# Altium PCB Tray3.PcbDoc
Units mil, origin at the board's own origin, x right, y up, seen from the top; angles counter-clockwise.
Board outline 4725 x 1180 mil, 2 copper layers (Top Layer, Bottom Layer); 13 components, 10 nets, 65 pads, 2 vias.
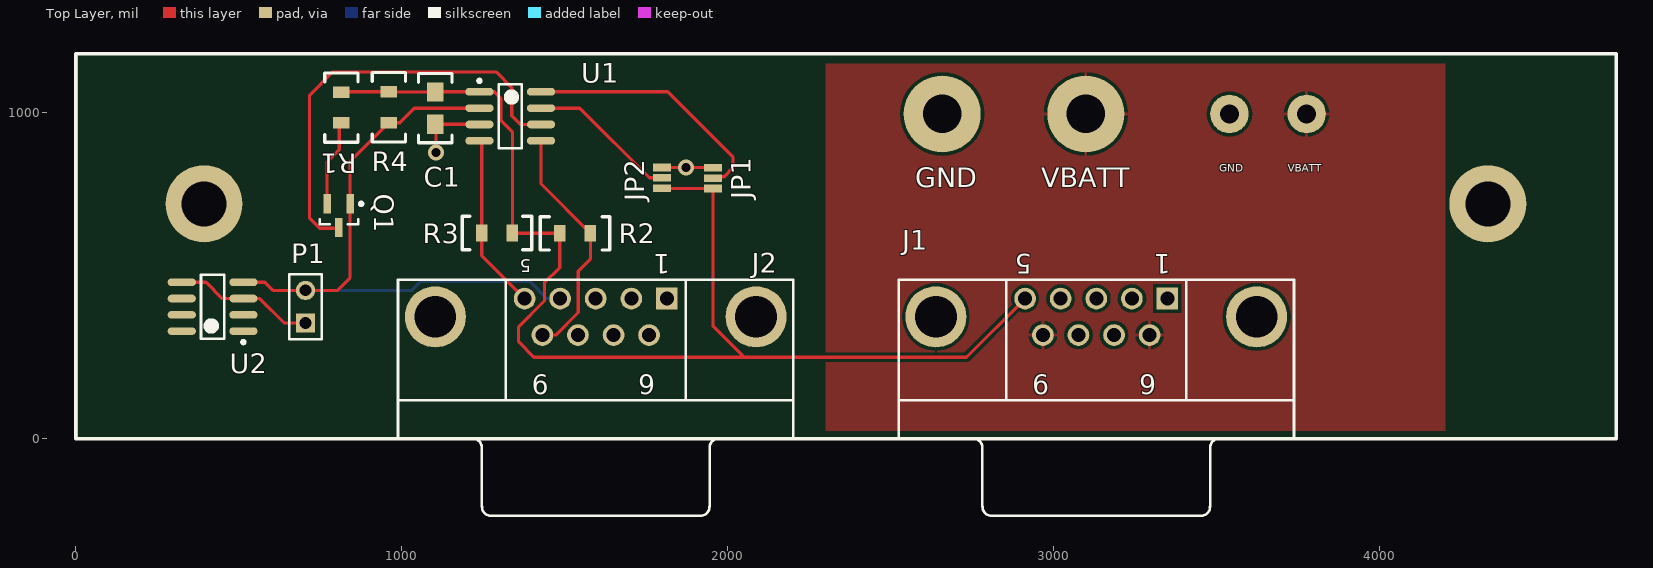
[diagram p0: Top Layer view]
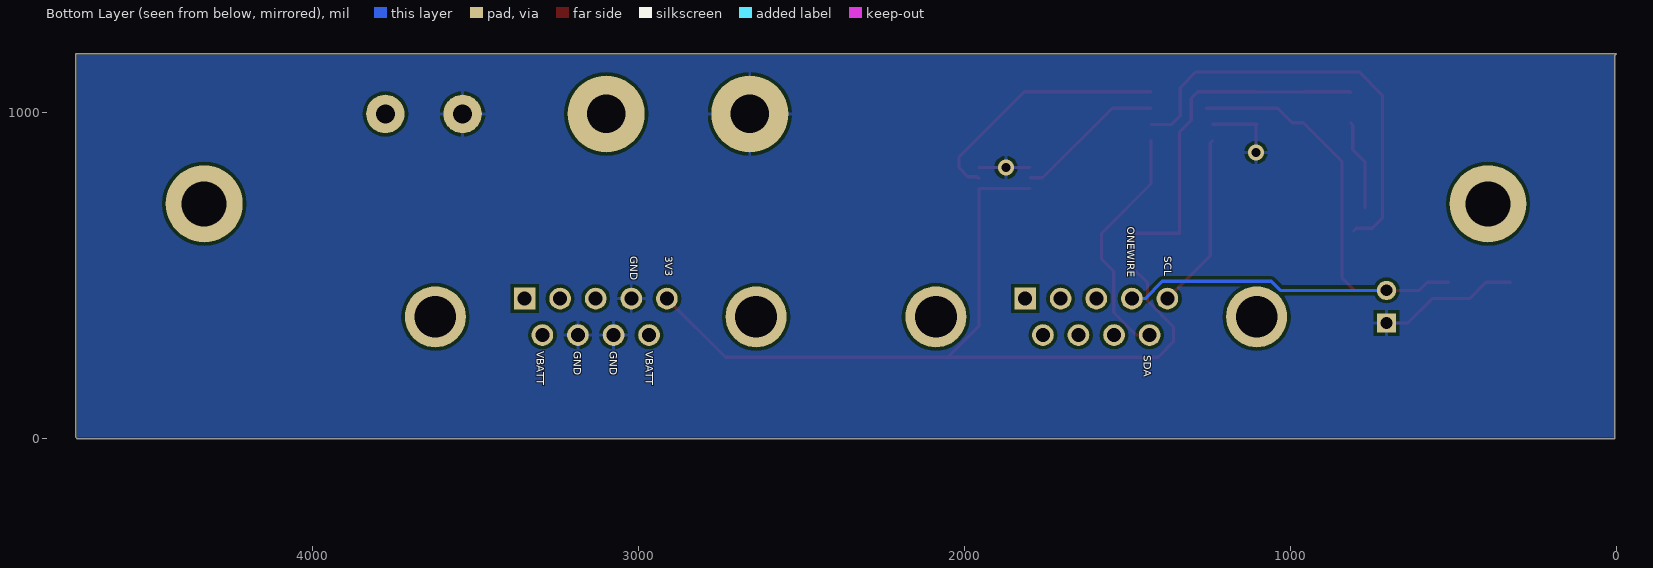
[diagram p1: Bottom Layer view, seen from below]

## Layer stack, top to bottom
Top Layer: signal copper 1.4
Dielectric: dielectric 12.6, FR-4, Dk 4.8
Bottom Layer: signal copper 1.4

## Board outline
0,1180 5,1175 5,0 4720,0 4725,5 4725,1180

## Design rules (kind name [scope] priority, off if disabled: settings)
Clearance [All] p1: gap=6
HoleSize [All] p1: absolutevalues=TRUE maxlimit=140 minlimit=1 maxpercent=80.000 minpercent=20.000
MinimumSolderMaskSliver [All] p1: minsoldermaskwidth=6
PolygonConnect [All] p1: connectstyle=Relief reliefconductorwidth=10 reliefentries=4 polygonreliefangle="90 Angle"
RoutingVias [All] p1: holewidth=28 width=50 viastyle="Through Hole" minholewidth=28 minwidth=50 maxholewidth=28 maxwidth=50
SilkscreenOverComponentPads [All] p1: minsilkscreentomaskgap=10
SolderMaskExpansion [All] p1: expansion=4
Width [All] p1: maxlimit=10 minlimit=10 preferedwidth=10
25 further rules are at their usual default settings.

## Classes and differential pairs
component class Tray3: J1 J2
component class Designator: U2

## Components (designator, comment, footprint, x,y, rotation, side; value= is the part's Value field where it differs from the comment)
C1 "0805 Cap" "0805 Cap" 1102.83,1013.98 r270 top
J1 "D Connector 9" DSUB1.385-2H9 3130,0 r180 top locked
J2 "D Connector 9" DSUB1.385-2H9 1595,0 r180 top locked
JP1 "Jumper Select" SOLDER_JUMPER_3_A 1962.6,807.09 r270 top
JP2 "Jumper Select" SOLDER_JUMPER_3_A 1806.1,808.07 r270 top
P1 "Header 2" HDR1X2 705,355 r90 top
Q1 "DMP2004K" DMP2004KDITR-ND 807.09,685.04 r270 top
R1 "0805 Resistor" "0805 Resistor" 814.96,1015.75 r270 top
R2 "0805 Resistor" "0805 Resistor" 1531.5,629.92 r0 top
R3 "0805 Resistor" "0805 Resistor" 1292.32,630.91 r180 top
R4 "0603 Resistor" "0805 Resistor" 960.63,1016.73 r270 top
U1 "DS24820Z+_ND" DS2482-100 1332.83,988.98 r0 top
U2 "TO-92" DS18S20 420,405 r180 top

## Footprints (in the part's own frame and the unit in brackets; to place one, negate y for a bottom-side part, rotate by r counter-clockwise, add the part's x,y. Pads: shape width x height; smd on the part's side, far side on the other; paste and mask are expansions set on the pad)
"0805 Cap" [mm] "0805 Capacitor"
  rect 1.5x1.25 smd: 1(1.25,0) 2(-1.25,0)
  silkscreen extent -2.7,-1.3 2.7,1.3, body extent -1,-0.63 1.1,0.63, height 0.9
"0805 Resistor" [mm] "0805 Resistor"
  rect 0.9x1.3 smd: 1(1.2,0) 2(-1.2,0)
  silkscreen extent -2.7,-1.3 2.7,1.3, body extent -1,-0.63 1.1,0.63, height 0.6
DMP2004KDITR-ND [mm] "SOT23, 3-Leads, Body 3.0x2.5mm (max), Pitch 0.89mm, IPC Medium Density"
  rect 1.5x0.6 smd: 1(-0.9,0.89) 2(-0.9,-0.89) 3(0.951,0)
  silkscreen extent -1.02,-1.5 0.7,1.87, body extent -0.7,-1.5 0.7,1.5, height 1.2
DS18S20 [mm] "SOIC, 8-Leads, Body 5.0x4.0mm (max), Pitch 1.27mm, IPC Medium Density"
  oval 2.2x0.6 smd: 1(-2.4,1.905) 2(-2.4,0.635) 3(-2.4,-0.635) 4(-2.4,-1.905) 5(2.4,-1.905) 6(2.4,-0.635) 7(2.4,0.635) 8(2.4,1.905)
  silkscreen extent -2.53,-2.5 0.9,2.88, body extent -2,-2.5 2,2.5, height 1.75
DS2482-100 [mm] "SOIC, 8-Leads, Body 5.0x4.0mm (max), Pitch 1.27mm, IPC Medium Density"
  oval 2.2x0.6 smd: 1(-2.4,1.905) 2(-2.4,0.635) 3(-2.4,-0.635) 4(-2.4,-1.905) 5(2.4,-1.905) 6(2.4,-0.635) 7(2.4,0.635) 8(2.4,1.905)
  silkscreen extent -2.52,-2.5 0.9,2.88, body extent -2,-2.5 2,2.5, height 1.75
DSUB1.385-2H9 [mm] "Connector; D Subminiature; 9 Position; Right Angle; Pitch 1.385 mm"
  rect 1.69x1.69 hole 1.09: 1(-5.54,-10.92)
  round 1.69 hole 1.09: 2(-2.77,-10.92) 3(0,-10.92) 4(2.77,-10.92) 5(5.54,-10.92) 6(-4.155,-8.08) 7(-1.385,-8.08) 8(1.385,-8.08) 9(4.155,-8.08)
  round 4.76 hole 3.26: 10(-12.495,-9.5) 11(12.495,-9.5)
  silkscreen extent -15.4,-12.4 15.4,6
HDR1X2 [mm] "Connector; Header; 2 Position"
  rect 1.5x1.5 hole 0.9: 1(0,0)
  round 1.5 hole 0.9: 2(2.54,0)
  silkscreen extent -1.27,-1.27 3.81,1.27
SOLDER_JUMPER_3_A [mm]
  rect 0.6x1.4 smd: 1(1,-0.2) 2(0.2,-0.2) 3(-0.6,-0.2)

## Part data
C1: library part "0805 MLCC - X7R, 10%", "0805 MLCC - X7R, 10%"
J1 J2: "Receptacle Assembly, 9 Position, Right Angle"
JP1 JP2: library part "Header 3", "Header, 3-Pin"
P1: "Header, 2-Pin"
Q1: "MOSFET P-CH 20V 600MA SOT23-3"
R1 R2 R3: library part "0805 Thick Film Resistor 1%", "0805 Thick Film Resistor 1%"
R4: library part "0603 Thick Film Resistor 1%", "0603 Thick Film Resistor 1%"
U2: library part DS18S20

## Free pads (board coordinates)
  round 236.22 hole 118.11: 0(2657.48,996.06) 0(3098,996.06)
  round 118.11 hole 59.06: 0(3538.48,996.06) 0(3775,996.06)
  round 236.22 hole 137.79 mask+4: MP0(393.7,720.47)
  round 236.22 hole 137.79: MP1(4330.7,720.47)

## Via types
v1: diameter 50, hole 28, Top Layer to Bottom Layer, 2 vias

## Nets (pads, with @x,y where several pads share a name; then routed paths per layer and width w, separated by ;. In a path a pad name is that pad's centre, name@x,y a point inside that pad or via, vN(x,y) a via of type N, cw(c..) or ccw(c..) an arc to the next point about the centre after c; other vN are vias at no path point)
3V3_BATT: C1.2 J1.5 JP1.1 JP2.1 R1.2 R2.2 R3.2 R4.2 U1.1 | length 3816.8
  Top Layer w10: R1.2 815.95,1063.98 R4.2 961.42,1063.19 C1.2 1103.62,1063.98 U1.1 1284.45,1063.98 1303.64,1044.78 1303.64,976.87 1339.57,940.94 R3.2 1340.55,629.92 R2.2 1484.25,524.76 1437.68,478.19 1437.68,422.45 1358.27,343.04 1358.27,297.24 1405.51,250 2050,250 ; JP2.1@1799.21,767.72 JP1.1 1954.72,345.28 2050,250 ; J1.5 2731.97,250 2050,250
GND: C1.1 J1.4 J1.7 J1.8 JP1.3 JP2.3 P1.1 pad.0@2657.48,996.06 pad.0@3538.48,996.06 U1.3 U2.3 U2.5 | length 811.8
  Top Layer w10: U2.5 400,480 450,430 U2.3 565,430 640,355 P1.1 ; v1(1105.32,877.95) 1105.32,962.28 C1.1 1237.56,964.76 U1.3 ; JP2.3 v1(1872.05,831.69) 1953.74,831.69 JP1.3
NetJP1_2: JP1.2 U1.8 | length 778.5
  Top Layer w10: U1.8 1815.94,1063.98 2015.75,864.17 2015.75,831.15 1988.5,803.9 1959.41,803.9 JP1.2
NetJP2_2: JP2.2 U1.7 | length 459.5
  Top Layer w10: U1.7 1546.06,1013.98 1759.84,800.2 JP2.2
NetQ1_2: Q1.2 R1.1 | length 279
  Top Layer w10: Q1.2@771.06,707.68 771.06,849.8 808.07,886.81 808.07,961.61 R1.1
NetQ1_3: Q1.3 U1.6 | length 1339.4
  Top Layer w10: Q1.3@806.1,636.81 797.24,645.67 748.03,645.67 717.52,676.18 717.52,1054.13 788.39,1125 1289.37,1125 1337.6,1076.77 1337.6,990.16 1363.78,963.98 U1.6
ONEWIRE: J2.4 P1.2 Q1.1 R4.1 U1.2 U2.4 | length 2008.7
  Top Layer w10: U2.4 580,480 605,455 P1.2 803.43,455 841.14,492.72 841.14,707.68 841.14,850 R4.1 994.09,969.49 1038.58,1013.98 U1.2 U1.2@1257.76,1013.98
  Bottom Layer w10: P1.2 1030.33,455 1058.05,482.72 1392.36,482.72 1445.15,429.92 J2.4
SCL_TELEM_BATT: J2.5 R3.1 U1.4 | length 542.2
  Top Layer w10: U1.4 U1.4@1245.08,907.24 ; U1.4@1245.59,906.73 U1.4@1245.08,907.24 ; J2.5 1245.08,561.73 R3.1 U1.4@1245.08,907.24
SDA_TELEM_BATT: J2.9 R2.1 U1.5 | length 744.9
  Top Layer w10: U1.5 1427.32,781.34 R2.1 1578.74,551.18 1541.34,513.78 1541.34,415.32 ; J2.9 1472.21,318.11 1541.34,387.24 1541.34,415.32 ; 1540.35,416.31 1541.34,415.32
VBATT: J1.6 J1.9 pad.0@3098,996.06 pad.0@3775,996.06
pads on no net: J1.1 J1.2 J1.3 J1.10 J1.11 J2.1 J2.2 J2.3 J2.6 J2.7 J2.8 J2.10 J2.11 U2.1 U2.2 U2.6 U2.7 U2.8

## Polygon pours and split planes (outlines as drawn)
VBATT on Top Layer "VBATT " (solid, pour order 4): 2300,1150 4200,1150 4200,25 2300,25
GND on Bottom Layer "GND " (solid, pour order 2): 4719.49,3.94 4719.49,1176.18 4.92,1176.18 4.92,4.92 4717.52,4.92 4718.5,3.94

## Silkscreen, mask and mechanical layers (free items; w line width, h text height)
Top Overlay:
  lines w10: 0,0 4724.41,0 4724.41,1181.1 0,1181.1 0,0
  text "GND" at 3507.87,818.9 h24
  text "VBATT" at 3716.54,818.9 h24
  text "GND" at 2574.8,771.65 h60
  text "VBATT" at 2960.63,771.65 h60
Bottom Overlay:
  text "ONEWIRE" at 1500,649.61 h24 r90
  text "SCL" at 1385.83,559.06 h24 r90
  text "3V3" at 2917.32,559.06 h24 r90
  text "GND" at 3023.62,559.06 h24 r90
  text "VBATT" at 2976.38,267.72 h24 r90
  text "GND" at 3086.61,267.72 h24 r90
  text "GND" at 3196.85,267.72 h24 r90
  text "VBATT" at 3311.02,267.72 h24 r90
  text "SDA" at 1448.82,255.91 h24 r90

## Text inside footprints (layer, text, board x,y; h text height)
J1: Top Overlay "1" at 3357.95,565.94 h59.06 r180; Top Overlay "5" at 2931.57,565.94 h59.06 r180; Top Overlay "9" at 2986.1,195.87 h59.06 r180; Top Overlay "6" at 3313.27,195.87 h59.06 r180
J2: Top Overlay "1" at 1822.95,565.94 h59.06 r180; Top Overlay "5" at 1397.64,551.18 h40 r180; Top Overlay "9" at 1451.1,195.87 h59.06 r180; Top Overlay "6" at 1778.27,195.87 h59.06 r180